# Altium PCB science-26.PcbDoc (part 1 of 2)
Units mm, origin at the board's own origin, x right, y up, seen from the top; angles counter-clockwise.
Board outline 76.84 x 97.03 mm, 4 copper layers (Top Layer, Layer 1, Layer 2, Bottom Layer), stack 1.586 mm thick; 101 components, 54 nets, 345 pads, 274 vias.
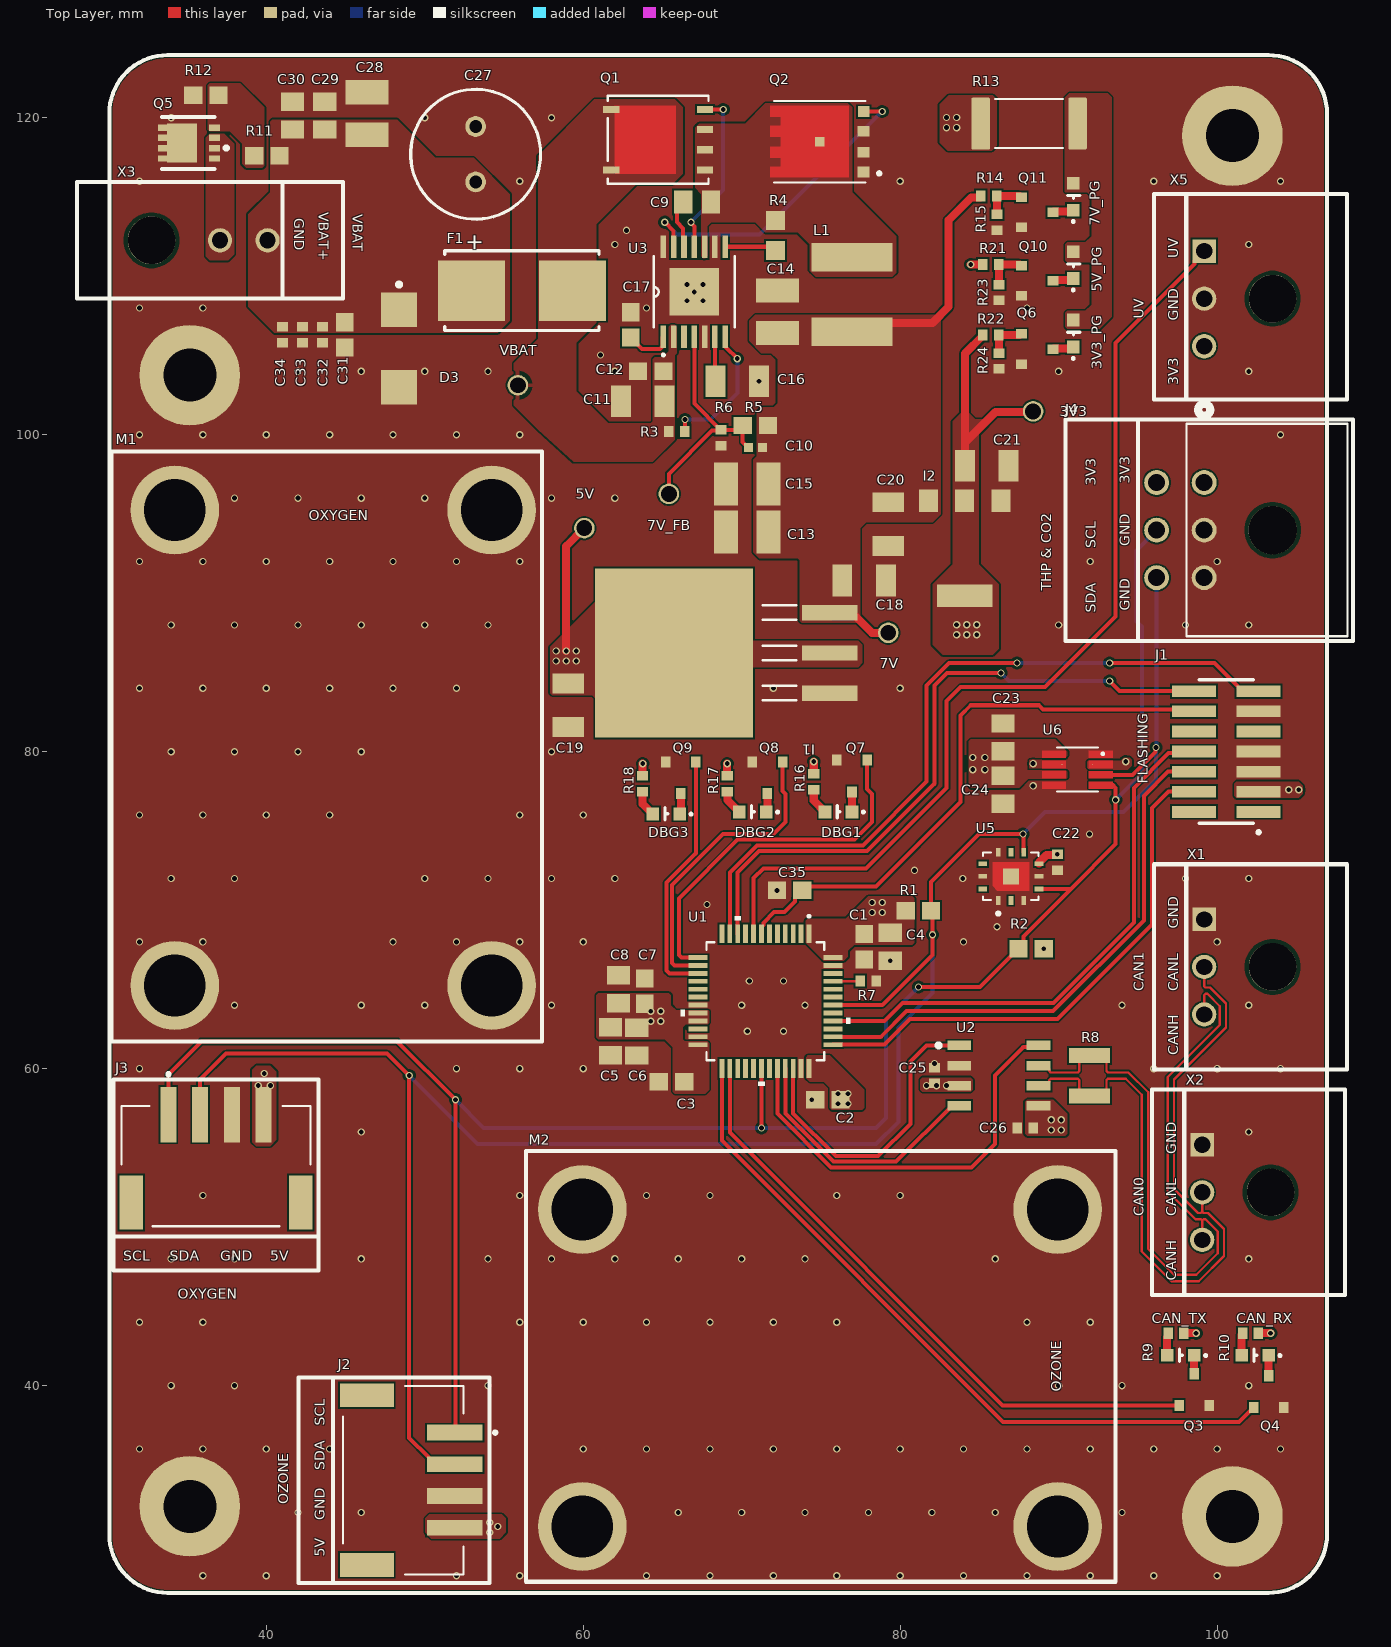
[diagram p0: Top Layer view]
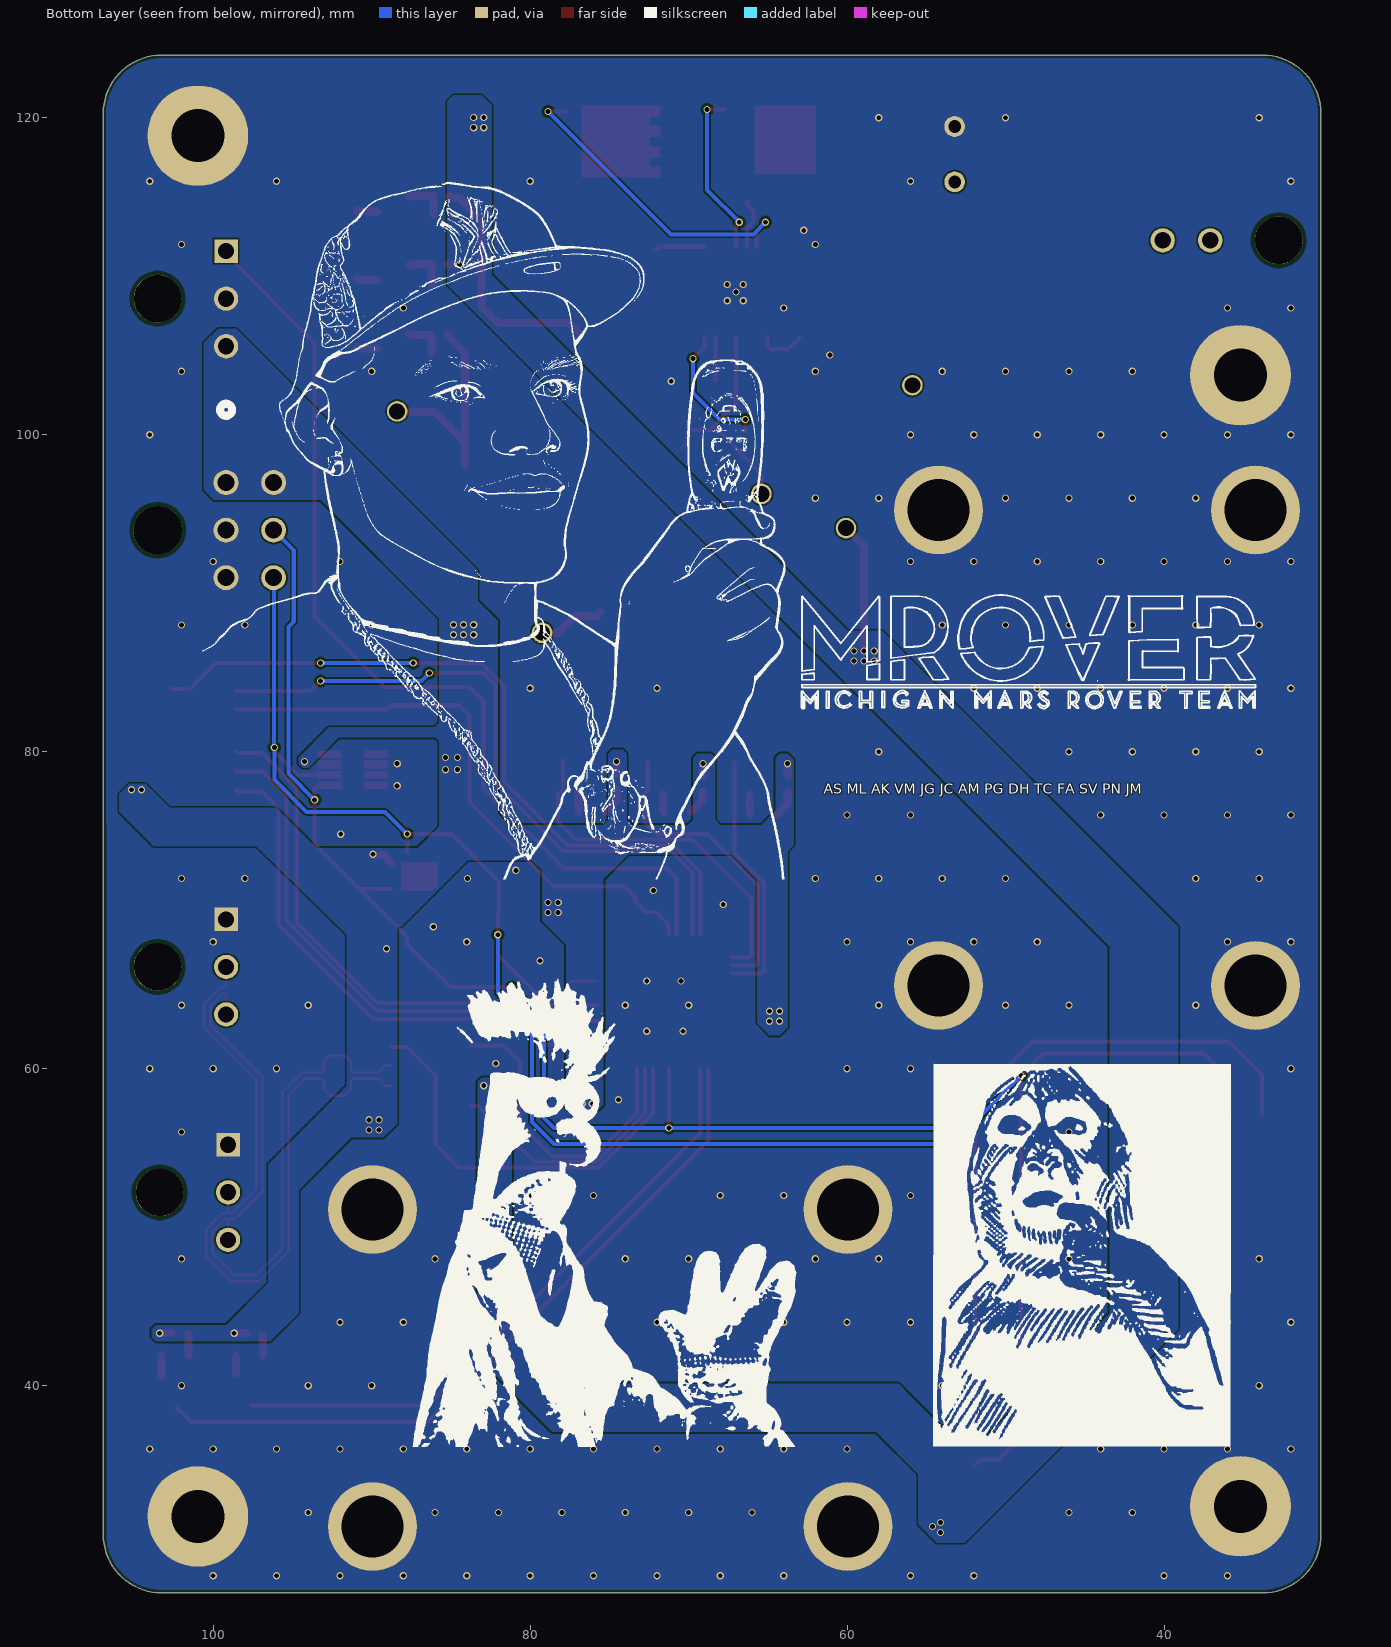
[diagram p1: Bottom Layer view, seen from below]
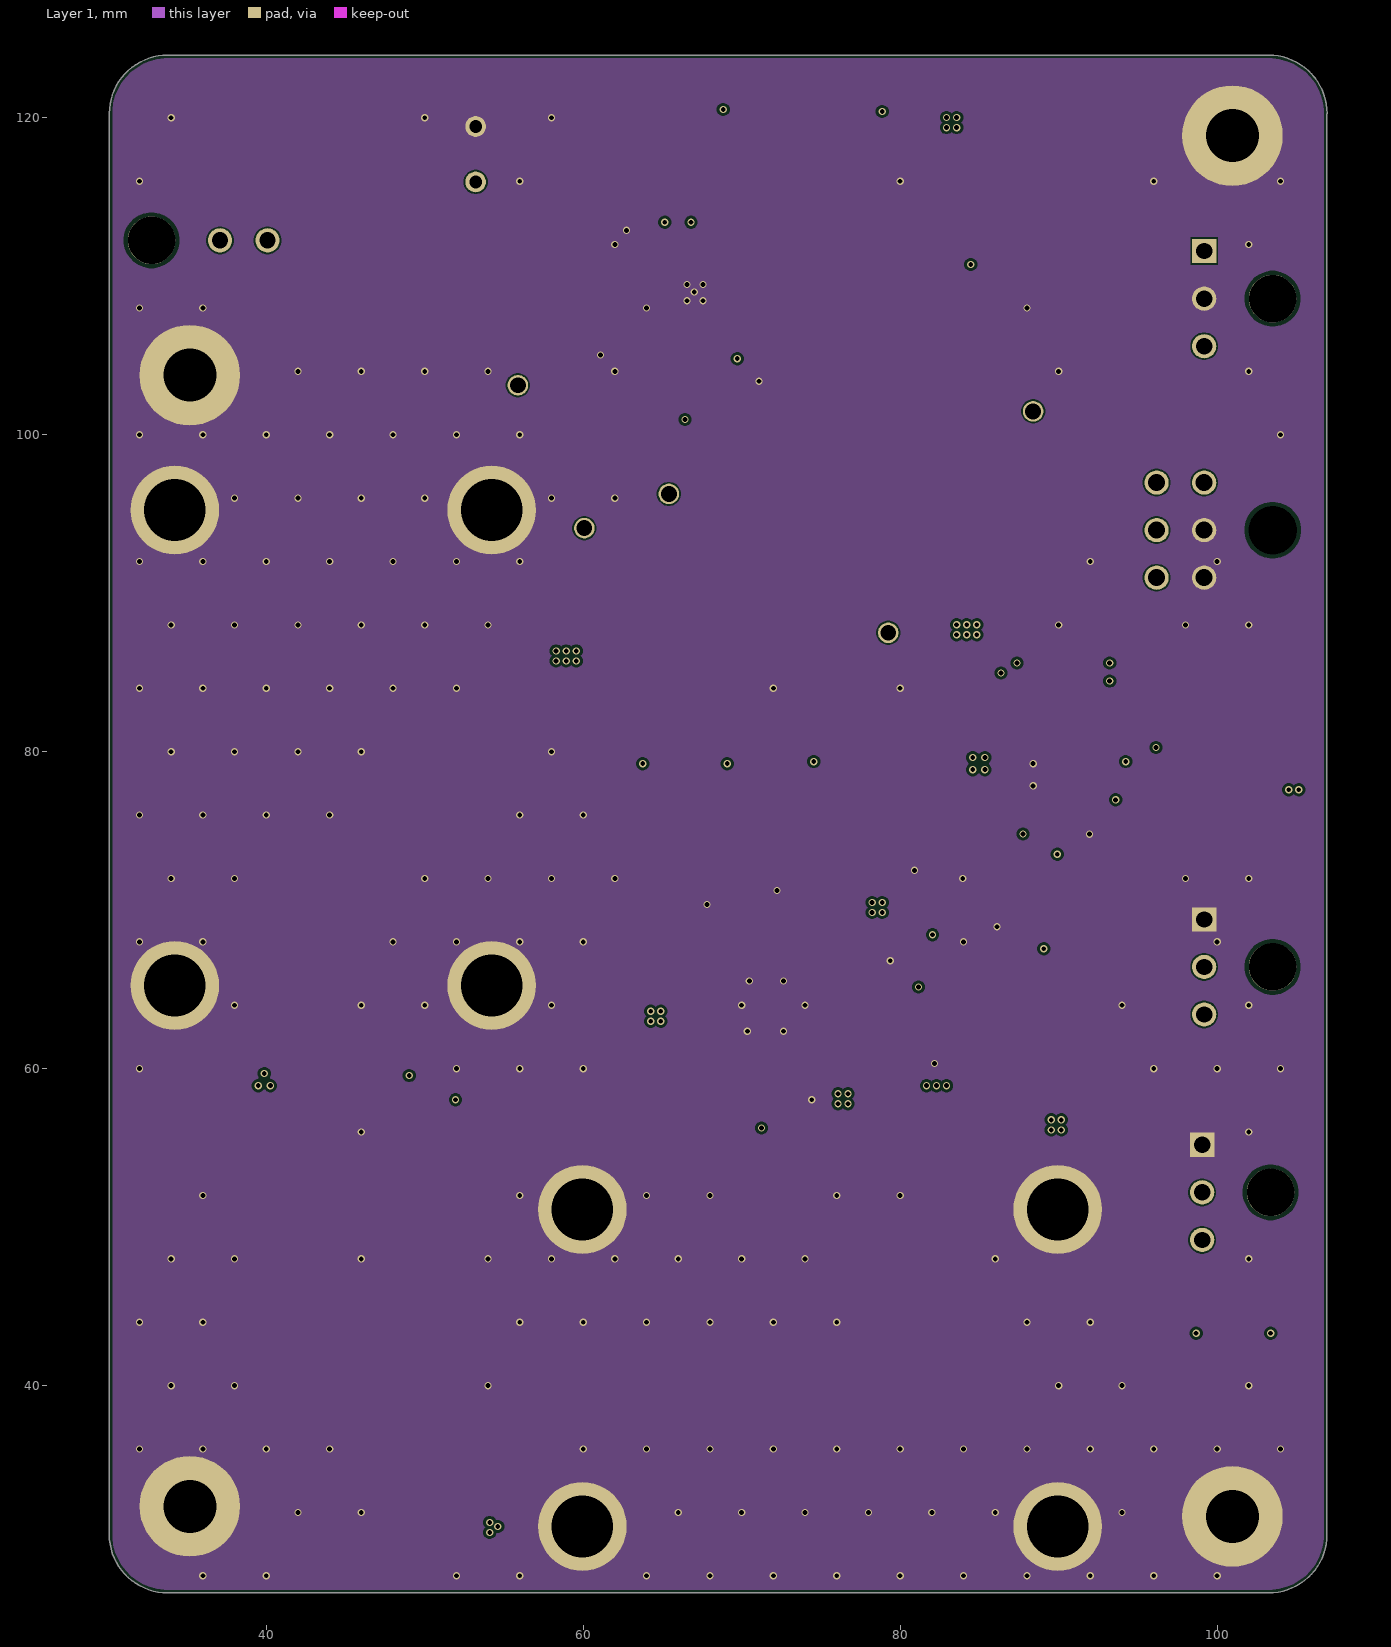
[diagram p2: Layer 1]
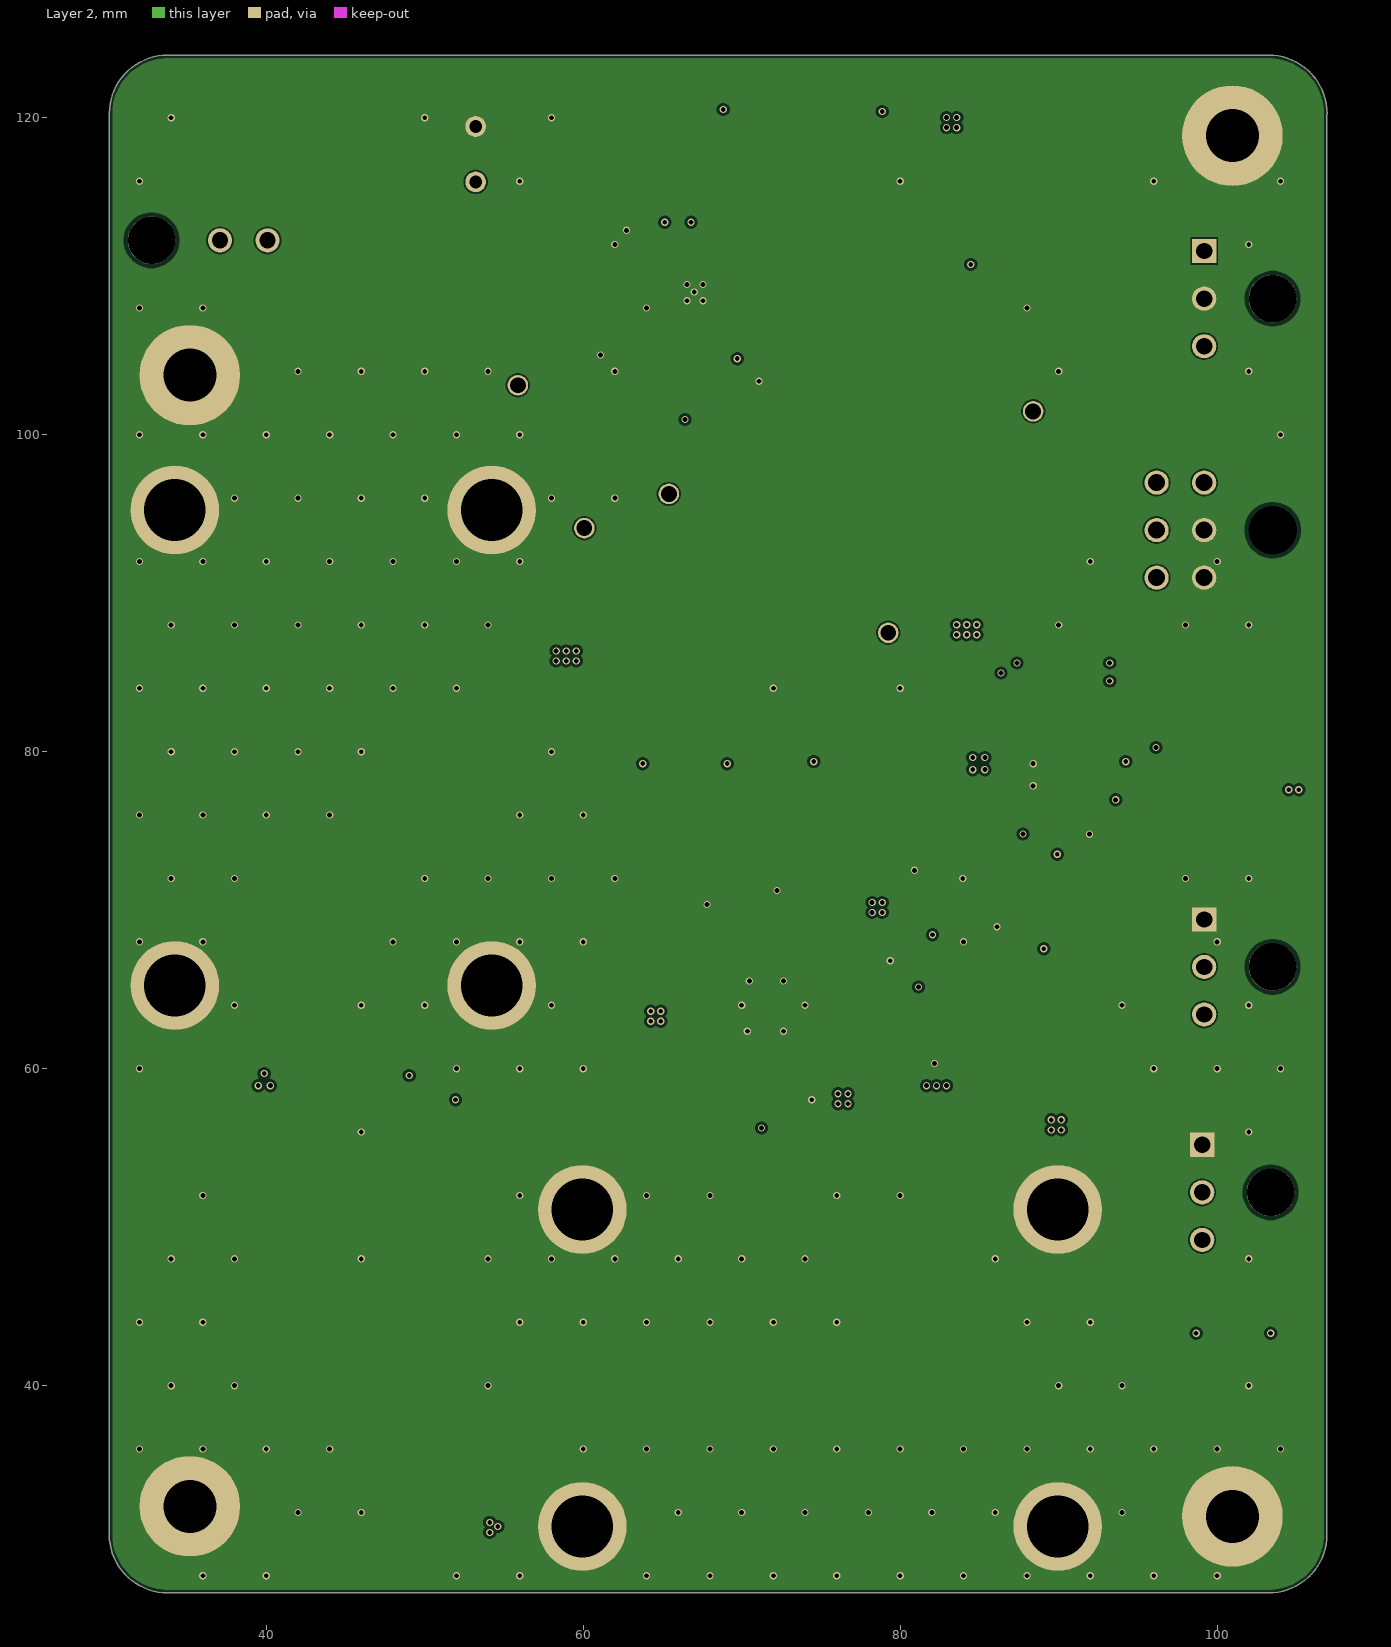
[diagram p3: Layer 2]

## Layer stack, top to bottom
Top Solder: solder mask 0.0102, Solder Resist, Dk 3.5
Top Layer: signal copper 0.035
Dielectric 2: prepreg 0.2103, PP-006, Dk 4.1
Layer 1: signal copper 0.0152
Dielectric 1: dielectric 1.065, FR-4, Dk 4.8
Layer 2: signal copper 0.0152
Dielectric 3: prepreg 0.2103, PP-006, Dk 4.1
Bottom Layer: signal copper 0.035
Bottom Solder: solder mask 0.0102, Solder Resist, Dk 3.5

## Board outline
30.097,30.609 ccw(c33.782,30.609) 33.782,26.924 103.247,26.924 103.249,26.922 ccw(c103.249,30.607) 106.934,30.607 106.934,120.265 106.936,120.267 ccw(c103.251,120.267) 103.251,123.952 33.786,123.952 33.784,123.954 ccw(c33.784,120.269) 30.099,120.269

## Design rules (kind name [scope] priority, off if disabled: settings)
BoardOutlineClearance [All] p1: gap=0.2 ignorepadtopadclearanceinfootprint=FALSE
Clearance "Stitching GND" [IsStitchingVia and InNet('GND') vs (IsVia and (Not IsStitchingVia)) Or IsPad] p1: gap=0.127 ignorepadtopadclearanceinfootprint=FALSE
Clearance [All] p2: gap=0.102 ignorepadtopadclearanceinfootprint=FALSE except(0.127: Arc-Via Track-Via SMDPad-Via THPad-Via Via-Via Via-Fill Via-Poly Via-Region Via-Text; 0.25: Arc-Hole Track-Hole SMDPad-Hole THPad-Hole Via-Hole Fill-Hole Poly-Hole Region-Hole Text-Hole)
ComponentClearance [All] p1: gap=0.102 collisioncheckmode=3 verticalgap=0.102 showdistances=TRUE
DiffPairsRouting CAN [OnLayer('Top Layer') And InDifferentialPairClass('CAN')] p1: maxlimit=0.254 minlimit=0.127 mostfreqgap=0.254 toplayer_mingap=0.254 toplayer_minwidth=0.144 toplayer_maxwidth=0.144 toplayer_prefwidth=0.144 midlayer1_maxgap=0.127 midlayer1_prefgap=0.127 midlayer1_minwidth=0.089 midlayer1_maxwidth=0.089 midlayer1_prefwidth=0.089 midlayer2_maxgap=0.127 midlayer2_prefgap=0.127 midlayer2_minwidth=0.089 midlayer2_maxwidth=0.089 midlayer2_prefwidth=0.089 bottomlayer_mingap=0.254 bottomlayer_minwidth=0.144 bottomlayer_maxwidth=0.144 bottomlayer_prefwidth=0.144 maxuncoupledlength=12.7
DiffPairsRouting [All] p2: maxlimit=0.102 minlimit=0.102 mostfreqgap=0.102 toplayer_minwidth=0.102 toplayer_maxwidth=1816.048 toplayer_prefwidth=0.102 midlayer1_minwidth=0.102 midlayer1_maxwidth=1816.048 midlayer1_prefwidth=0.102 midlayer2_minwidth=0.102 midlayer2_maxwidth=1816.048 midlayer2_prefwidth=0.102 bottomlayer_minwidth=0.102 bottomlayer_maxwidth=1816.048 bottomlayer_prefwidth=0.102 maxuncoupledlength=12.7
Height [All] p1: minheight=0 maxheight=1816.048 prefheight=12.7
HoleSize [All] p1: absolutevalues=TRUE maxlimit=6.3 minlimit=0.2 maxpercent=80.000 minpercent=20.000
HoleToHoleClearance [All] p1: gap=0.25 allowstackedmicrovias=FALSE
MinimumAnnularRing [All] p1: minimumring=0.076
MinimumSolderMaskSliver [All] p1: minsoldermaskwidth=0
PlaneClearance [All] p1: clearance=0.102
PlaneConnect PlaneConnectPowerPads [InPadClass('PowerPads')] p1: planeconnectstyle=Direct reliefexpansion=0.508 reliefentries=4 reliefconductorwidth=0.254 reliefairgap=0.254
PlaneConnect [All] p2: planeconnectstyle=Direct reliefexpansion=0.3 reliefentries=4 reliefconductorwidth=0.102 reliefairgap=0.102
PolygonConnect PolygonConnectPowerPads [All vs (InPadClass('PowerPads'))] p1: connectstyle=Direct reliefconductorwidth=0.254 reliefentries=4 polygonreliefangle="90 Angle" airgapwidth=0.254
PolygonConnect [All] p2: connectstyle=Direct reliefconductorwidth=0.102 reliefentries=4 polygonreliefangle="90 Angle" airgapwidth=0.102
RoutingVias [All] p1: holewidth=0.305 width=0.605 viastyle="Through Hole" minholewidth=0.3 minwidth=0.6 maxholewidth=0.405 maxwidth=0.705
SilkToSilkClearance [All] p1: silktosilkclearance=0
SilkToSolderMaskClearance [IsPad] p1: minsilkscreentomaskgap=0.102 clearancetoexposedcopper=TRUE
SolderMaskExpansion [All] p1: expansion=0.075 istentingtop=FALSE
SupplyNets "Schematic Supply Nets_5" [InNet('7V')] p1: voltage=0.000
SupplyNets "Schematic Supply Nets_4" [InNet('VBAT_UNFUSED')] p2: voltage=0.000
SupplyNets "Schematic Supply Nets_2" [InNet('VBAT')] p3: voltage=0.000
SupplyNets "Schematic Supply Nets_3" [InNet('GND')] p4: voltage=0.000
SupplyNets "Schematic Supply Nets_1" [InNet('5V')] p5: voltage=0.000
SupplyNets "Schematic Supply Nets" [InNet('3V3')] p6: voltage=0.000
Width [All] p1: maxlimit=0.508 minlimit=0.127 preferedwidth=0.254 minimp=50.000000 maximp=50.000000 favimp=50.000000
20 further rules are at their usual default settings.

## Classes and differential pairs
differential pair class CAN: CAN
component class U_Headers: J2 J3 J4 M1 M2
net class CAN: CAN_N CAN_P
component class U_UV_Sensor: X5
component class U_THP_Sensor: C23 C24 U6
component class U_MCU: C1 C2 C3 C4 C5 C6 C7 C8 C35 DBG1 DBG2 DBG3 J1 Q7 Q8 Q9 R1 R2 R7 R16 R17 R18 U1
component class U_Input_Power: C27 C28 C29 C30 C31 C32 C33 C34 D3 F1 Q5 R11 R12 X3
component class U_CO2_Sensor: C22
component class U_CAN: C25 C26 CAN_RX CAN_TX Q3 Q4 R8 R9 R10 U2 X1 X2
component class U_7V_Buck: 7V 7V_FB C9 C10 C11 C12 C13 C14 C15 C16 C17 L1 Q1 Q2 R3 R4 R5 R6 U3 VBAT
component class U_5V_3V3_LDO: 3V3 3V3_PG 5V 5V_PG 7V_PG C18 C19 C20 C21 I1 I2 Q6 Q10 Q11 R13 R14 R15 R21 R22 R23 R24
differential pair CAN: +CAN_P -CAN_N

## Components (designator, comment, footprint, x,y, rotation, side; value= is the part's Value field where it differs from the comment)
3V3 "5003" TEST-POINT-0001 88.392,101.473 r0 top
3V3_PG "BL-HKC36G-AV-TRB" LED-0603 91.683,104.948 r90 top
5V "5003" TEST-POINT-0001 60.071,94.107 r0 top
5V_PG "BL-HKC36G-AV-TRB" LED-0603 91.683,109.266 r90 top
7V "5003" TEST-POINT-0001 79.248,87.503 r180 top
7V_FB "5003" TEST-POINT-0001 65.405,96.266 r180 top
7V_PG "BL-HKC36G-AV-TRB" LED-0603 91.683,113.584 r90 top
C1 "CC0603KRX7R0BB104" CAP-0603 77.724,67.691 r90 top
C2 "CC0603KRX7R0BB104" CAP-0603 75.438,58.039 r0 top
C3 "CC0603KRX7R0BB104" CAP-0603 65.57,59.182 r0 top
C4 "CC0805KKX5R9BB475" CAP-0805 79.375,67.691 r90 top
C5 "GRM2195C1H103JA01D" CAP-0805 61.722,61.722 r90 top
C6 "CC0805KKX7R9BB105" CAP-0805 63.373,61.713 r90 top
C7 "CC0603KRX7R0BB104" CAP-0603 63.881,64.897 r270 top
C8 "CC0805KKX7R9BB105" CAP-0805 62.23,65.015 r270 top
C9 "KAM21KR72A474KL" CAP-0805 67.183,114.681 r180 top
C10 "CC0402JRNPO9BN500" CAP_CC0402_YAG 70.866,99.187 r0 top
C11 "CL31B106KBHNNNE" CAP-1206 63.754,102.108 r180 top
C12 "CC0603KRX7R0BB104" CAP-0603 64.262,104.013 r180 top
C13 "CL32B226KAJNNNE" CAP-1210 70.358,93.853 r0 top
C14 "CL32B226KAJNNNE" CAP-1210 72.263,107.767 r270 top
C15 "CL32B226KAJNNNE" CAP-1210 70.358,96.901 r0 top
C16 "GMC31CG153J200NT" CAP-1206 69.723,103.378 r0 top
C17 "UMK107BBJ225KA-T" CAP-0603 62.992,106.934 r90 top
C18 "293D106X9016A2TE3" CAP-1206 77.724,90.805 r180 top
C19 "293D106X9016A2TE3" CAP-1206 59.055,82.931 r90 top
C20 "293D106X9016A2TE3" CAP-1206 79.248,94.361 r90 top
C21 "293D106X9016A2TE3" CAP-1206 85.471,98.044 r180 top
C22 "CC0402KRX7R7BB104" CAP-0402 89.916,73.025 r270 top
C23 "CC0805KRX7R9BB104" CAP-0805 86.487,80.899 r90 top
C24 "CC0805KRX7R9BB104" CAP-0805 86.487,77.606 r270 top
C25 "CC0402KRX7R7BB104" CAP-0402 82.169,59.571 r90 top
C26 "CC0402KRX7R7BB104" CAP-0402 87.884,56.261 r180 top
C27 "860040674004" WCAP-ATUL_8X11.5(DXL) 53.213,117.701 r270 top
C28 "CL32B106KBJNNNE" CAP-1210 46.355,120.269 r270 top
C29 "CC0805KKX7R9BB105" CAP-0805 43.688,120.142 r270 top
C30 "CC0805KRX7R9BB104" CAP-0805 41.656,120.142 r270 top
C31 "CC0603KPX7R9BB103" CAP-0603 44.958,106.299 r90 top
C32 "CC0402KRX7R9BB102" CAP-0402 43.561,106.299 r90 top
C33 "CC0402JRNPO9BN101" CAP-0402 42.291,106.299 r90 top
C34 "CC0402JRNPO9BN100" CAP-0402 41.021,106.299 r90 top
C35 "CC0603KRX7R0BB104" CAP-0603 73.025,71.247 r180 top
CAN_RX "BL-HKC36G-AV-TRB" LED-0603 103.84,42.661 r180 top
CAN_TX "BL-HKC36G-AV-TRB" LED-0603 99.141,42.661 r180 top
D3 "SMBJ40CA" "DO-214AA (SMBJ)" 48.387,105.41 r90 top
DBG1 "BL-HKC36G-AV-TRB" LED-0603 77.551,76.951 r180 top
DBG2 "BL-HKC36G-AV-TRB" LED-0603 72.141,76.951 r180 top
DBG3 "BL-HKC36G-AV-TRB" LED-0603 66.68,76.824 r180 top
F1 "01550900M" FUSE-0001 56.134,109.093 r0 top
I1 "LM1085ISX-5.0NOPB" IC-TO-263-4 65.888,86.233 r90 top
I2 "LM1117IMPX-3.3/NOPB" IC-SOT-223-4 84.074,92.837 r270 top
J1 "FTSH-107-01-L-DV-K" SAMTEC_FTSH-107-01-L-DV-K 100.584,80.01 r90 top
J2 "S4B-PH-SM4-TB" JST_S4B-PH-SM4-TB 49.149,34.036 r270 top
J3 "S4B-PH-SM4-TB" JST_S4B-PH-SM4-TB 36.83,54.356 r0 top
J4 "430450600" CONN_SD-43045-001_06_MOL 99.185,96.98 r90 top
L1 "SRN6045TA-4R7M" PWRIND-4.7U-0001 76.962,108.839 r180 top
M1 "DK-Oxygen" DK-Oxygen 34.229,95.25 r270 top locked
M2 "DK-Ozone" DK-Ozone 59.944,31.115 r0 top locked
Q1 "NTMFS5C670NLT1G" NTMFS5C670NLT1G_ONS 64.732,118.618 r180 top
Q2 "CSD19534Q5A" TRANS_CSD19534Q5A 74.93,118.491 r180 top
Q3 "T2N7002AK,LM" IC-SOT23-3 98.552,39.751 r0 top
Q4 "T2N7002AK,LM" IC-SOT23-3 103.251,39.624 r0 top
Q5 "CSD18543Q3AT" IC-8VSONCLIP 37.605,116.568 r90 top
Q6 "T2N7002AK,LM" IC-SOT23-3 88.646,105.41 r270 top
Q7 "T2N7002AK,LM" IC-SOT23-3 76.962,78.47 r180 top
Q8 "T2N7002AK,LM" IC-SOT23-3 71.628,78.359 r180 top
Q9 "T2N7002AK,LM" IC-SOT23-3 66.167,78.359 r180 top
Q10 "T2N7002AK,LM" IC-SOT23-3 88.646,109.728 r270 top
Q11 "T2N7002AK,LM" IC-SOT23-3 88.646,114.046 r270 top
R1 "RC0603FR-074K7L" RES-0603 81.153,69.977 r0 top
R2 "RC0603FR-074K7L" RES-0603 88.265,67.564 r180 top
R3 "AC0402FR-7W90K9L" RES-0402 65.913,100.203 r0 top
R4 "RT0805BRD072K21L" RES-0805 72.136,112.583 r90 top
R5 "RC0603FR-07100KL" RES-0603 70.866,100.584 r0 top
R6 "RC0402FR-0710KL" RES-0402 68.707,99.814 r90 top
R7 "RC0402FR-070RL" RES-0402 77.978,65.532 r180 top
R8 "RC1210FR-07120RL" RES-1210 91.948,59.563 r90 top
R9 "RC0402FR-07100RL" RES-0402 97.409,43.307 r0 top
R10 "RC0402FR-07100RL" RES-0402 102.108,43.307 r0 top
R11 "RC0603FR-07200KL" RES-0603 40.043,117.602 r180 top
R12 "RC0603FR-07100KL" RES-0603 36.195,121.412 r180 top
R13 "SR2512JK-7W100RL" RESC6331X65N 88.138,119.634 r0 top
R14 "AC0402FR-0722KL" RES-0402 85.59,115.062 r0 top
R15 "RC0402FR-0710KL" RES-0402 86.106,113.411 r270 top
R16 "RC0402FR-07100RL" RES-0402 74.549,78.105 r90 top
R17 "RC0402FR-07100RL" RES-0402 69.088,77.978 r90 top
R18 "RC0402FR-07100RL" RES-0402 63.754,77.978 r90 top
R21 "RC0402FR-0710KL" RES-0402 85.717,110.744 r0 top
R22 "RC0402FR-074K7P" RES-0402 85.717,106.299 r0 top
R23 "RC0402FR-0710KL" RES-0402 86.233,108.974 r90 top
R24 "RC0402FR-0710KL" RES-0402 86.233,104.656 r90 top
U1 "STM32G431CBT6" IC-LQFP48 71.501,64.262 r270 top
U2 "TCAN1044VDRQ1" IC-8SOIC 86.233,59.563 r270 top
U3 "LM3150MHE/NOPB" MXA14A 67.011,109.017 r90 top
U5 "STC31-C-R3" XDCR_STC31-C-R3 86.992,72.136 r90 top
U6 "BME280" PSON65P250X250X100-8N 91.186,78.867 r0 top
VBAT "5003" TEST-POINT-0001 55.88,103.124 r0 top
X1 "Molex 43650-0300" 43650-0300 103.505,66.421 r90 top
X2 "Molex 43650-0300" 43650-0300 103.378,52.197 r90 top
X3 "Molex - Micro-Fit 3.0 Series connector,  3.00mm (0.118\") pitch header, 2 positions." 43045-0200 32.764,112.268 r270 top
X5 "Molex 43650-0300" 43650-0300 103.505,108.585 r90 top

## Footprints (in the part's own frame and the unit in brackets; to place one, negate y for a bottom-side part, rotate by r counter-clockwise, add the part's x,y. Pads: shape width x height; smd on the part's side, far side on the other; paste and mask are expansions set on the pad)
43045-0200 [mm]
  round 3 hole 3 unplated: 1(0,0)
  round 1.53 / inner round 1.524 / far side round 1.53 hole 1.02: P$1(0,4.32) P$2(0,7.32)
  body extent -3.57,-4.57 3.57,7.67, height 9.83
43650-0300 [mm]
  round 3 hole 3 unplated: 1(0,0)
  rect 1.482x1.482 / inner rect 1.524x1.524 / far side rect 1.482x1.482 hole 1.02: P$1(3,4.32)
  round 1.53 / inner round 1.524 / far side round 1.53 hole 1.02: P$2(0,4.32) P$3(-3,4.32)
  body extent -6.32,-4.57 6.33,5.33, height 5.68
CAP-0402 [mm]
  rect 0.6x0.7 smd: 1(-0.5,0) 2(0.5,0)
  body extent -0.5,-0.22 0.5,0.23, height 0.5
CAP-0603 [mm]
  rect 1.15x1.1 smd: 1(-0.8,0) 2(0.8,0)
  body extent -0.8,-0.45 0.8,0.45, height 0.8
CAP-0805 [mm]
  rect 1.16x1.47 smd: 1(-0.88,0) 2(0.88,0)
  body extent -1,-0.63 1,0.63, height 0.94
CAP-1206 [mm]
  rect 1.25x2 smd: 1(-1.375,0) 2(1.375,0)
  body extent -1.6,-0.8 1.6,0.8, height 1.5
CAP-1210 [mm]
  rect 1.53x2.72 smd: 1(-1.341,0) 2(1.341,0)
  body extent -1.6,-1.25 1.6,1.25, height 2.7
CAP_CC0402_YAG [mil]
  rect 22x22 smd paste+0 mask+0: 1(-17.5,0) 2(17.5,0)
  body extent -21,-11 21,11, height 22
CONN_SD-43045-001_06_MOL [mil]
  round 62 / inner round 60 / far side round 62 hole 42 paste-99999 mask+0: 1(0,0) 2(-118.11,0) 3(-236.22,0) 4(0,118.11) 5(-118.11,118.11) 6(-236.22,118.11)
  round 120 / inner round 60 / far side round 120 hole 120 unplated paste-99999 mask+0: 7(-118.11,-170.08)
  silkscreen extent -382,-356 196,44, body extent -377,-350 141,132, height 367
DK-Oxygen [mm]
  round 5.6 hole 3.9: 0(0,20) 0(0,0) 0(30,20) 0(30,0)
  body extent -3.51,-3.85 33.49,23.15, height 30.93
DK-Ozone [mm]
  round 5.6 hole 3.9: 0(0,0) 0(0,20) 0(30,0) 0(30,20)
  body extent -3.51,-3.56 33.49,23.44, height 22.2
"DO-214AA (SMBJ)" [mm]
  rect 2.16x2.26 smd: 1(-2.416,0) 2(2.484,0)
  silkscreen extent 3.94,-0.13 4.19,0.12, body extent -2.72,-1.95 2.78,1.95, height 2.45
FUSE-0001 [mil]
  rect 167x150 smd paste+0 mask+0: 1(-125.5,0) 2(125.5,0)
  silkscreen extent -192,-99 192,99, body extent -213,-103 213,103, height 10
IC-8SOIC [mm]
  rect 0.6x1.5 smd: 1(-1.905,-2.5) 2(-0.635,-2.5) 3(0.635,-2.5) 4(1.905,-2.5) 5(1.905,2.5) 6(0.635,2.5) 7(-0.635,2.5) 8(-1.905,2.5)
  silkscreen extent -2.03,-3.93 -1.78,-3.68, body extent -2.45,-3 2.45,3, height 1.75
IC-8VSONCLIP [mm]
  rect 0.4x0.7 smd paste-100 mask+0.05: 1(2.812,0.877) 2(0.862,0.877) 2(1.512,0.877) 2(2.162,0.877) 3(0.862,4.077) 3(1.512,4.077) 3(2.162,4.077) 3(2.812,4.077)
  rect 2.45x1.9 smd paste-100 mask+0.05: 3(1.837,2.917)
  silkscreen extent 0.19,0.03 3.49,4.18, body extent 0.18,0.89 3.48,4.19, height 1.1
IC-LQFP48 [mm]
  rect 1.194x0.305 smd paste+0 mask+0: 1(-4.25,2.75) 2(-4.25,2.25) 3(-4.25,1.75) 4(-4.25,1.25) 5(-4.25,0.75) 6(-4.25,0.25) 7(-4.25,-0.25) 8(-4.25,-0.75) 9(-4.25,-1.25) 10(-4.25,-1.75) 11(-4.25,-2.25) 12(-4.25,-2.75) 25(4.25,-2.75) 26(4.25,-2.25) 27(4.25,-1.75) 28(4.25,-1.25) 29(4.25,-0.75) 30(4.25,-0.25) 31(4.25,0.25) 32(4.25,0.75) 33(4.25,1.25) 34(4.25,1.75) 35(4.25,2.25) 36(4.25,2.75)
  rect 0.305x1.194 smd paste+0 mask+0: 13(-2.75,-4.25) 14(-2.25,-4.25) 15(-1.75,-4.25) 16(-1.25,-4.25) 17(-0.75,-4.25) 18(-0.25,-4.25) 19(0.25,-4.25) 20(0.75,-4.25) 21(1.25,-4.25) 22(1.75,-4.25) 23(2.25,-4.25) 24(2.75,-4.25) 37(2.75,4.25) 38(2.25,4.25) 39(1.75,4.25) 40(1.25,4.25) 41(0.75,4.25) 42(0.25,4.25) 43(-0.25,4.25) 44(-0.75,4.25) 45(-1.25,4.25) 46(-1.75,4.25) 47(-2.25,4.25) 48(-2.75,4.25)
  silkscreen extent -5.43,-5.35 5.35,5.35, body extent -4.5,-4.5 4.5,4.5, height 1.6
IC-SOT23-3 [mm]
  rect 0.6x0.7 smd: 1(-0.95,-1) 2(0.95,-1) 3(0,1)
  body extent -1.46,-1.18 1.46,1.19, height 1.12
IC-SOT-223-4 [mm]
  rect 1.4x1.2 smd mask+0.07: 1(-3,2.3) 3(-3,-2.3) 4(-3,0)
  rect 1.4x3.5 smd: 2(3,0)
  body extent -3.5,-3.25 3.5,3.25, height 1.68
IC-TO-263-4 [mil]
  rect 38x138 smd: 1(-100,-381) 2(0,-381) 3(100,-381)
  rect 420x392 smd: 4(0,6)
  silkscreen extent -118,-298 118,-214, body extent -210,-365 210,118, height 67
JST_S4B-PH-SM4-TB [mm]
  rect 1x3.5 smd: 1(-3,2.75) 2(-1,2.75) 3(1,2.75) 4(3,2.75)
  rect 1.5x3.4 smd: SH1(-5.35,-2.8) SH2(5.35,-2.8)
  silkscreen extent -5.95,-4.3 5.95,5.4, body extent -5.95,-4.3 5.95,4.3, height 5.5
LED-0603 [mm]
  rect 0.8x0.8 smd: 1(2.291,0.751) 2(0.589,0.751)
  silkscreen extent -0.2,0.34 1.52,1.13, body extent 0.65,0.36 2.25,1.16, height 0.39
MXA14A [mil]
  rect 56x14 smd: 1(-112,76.77) 2(-112,51.18) 3(-112,25.59) 4(-112,0) 5(-112,-25.59) 6(-112,-51.18) 7(-112,-76.77) 8(112,-76.77) 9(112,-51.18) 10(112,-25.59) 11(112,0) 12(112,25.59) 13(112,51.18) 14(112,76.77)
  rect 118x122 smd paste-61 mask-61: 15(0,0)
  silkscreen extent -160,-100 88,100, body extent -126,-101 126,101, height 43
NTMFS5C670NLT1G_ONS [mil]
  rect 40x18 smd paste+0 mask+0: 1(-116.5,-75) 2(-116.5,75) 2(-116.5,-25) 2(-116.5,25) 3(116.5,75) 3(116.5,-75)
  Top Layer region: 108.5,-84.65 108.5,84.65 -43.5,84.65 -43.5,-84.65
  silkscreen extent -125,-110 125,110, body extent -124,-104 124,104, height 43
PSON65P250X250X100-8N [mm]
  round 0.025 smd: 1(0.97,0.975) 2(0.97,0.325) 3(0.97,-0.325) 4(0.97,-0.975) 5(-0.97,-0.975) 6(-0.97,-0.325) 7(-0.97,0.325) 8(-0.97,0.975)
  Top Layer region: 0.725,1.2 0.725,0.75 2.225,0.75 2.225,1.2
  Top Layer region: -2.225,0.55 -2.225,0.1 -0.725,0.1 -0.725,0.55
  Top Layer region: -2.225,-0.75 -2.225,-1.2 -0.725,-1.2 -0.725,-0.75
  Top Layer region: 0.725,0.55 0.725,0.1 2.225,0.1 2.225,0.55
  Top Layer region: -2.225,-0.1 -2.225,-0.55 -0.725,-0.55 -0.725,-0.1
  Top Layer region: -2.225,1.2 -2.225,0.75 -0.725,0.75 -0.725,1.2
  Top Layer region: 0.725,-0.1 0.725,-0.55 2.225,-0.55 2.225,-0.1
  Top Layer region: 0.725,-0.75 0.725,-1.2 2.225,-1.2 2.225,-0.75
  silkscreen extent -1.3,-1.39 1.65,1.39, body extent -1.3,-1.25 1.2,1.25, height 1
PWRIND-4.7U-0001 [mm]
  rect 5.1x1.8 smd: 1(0,-2.35) 2(0,2.35)
RES-0402 [mm]
  rect 0.6x0.7 smd: 1(-0.5,0) 2(0.5,0)
  body extent -0.5,-0.25 0.5,0.25, height 0.3
RES-0603 [mm]
  rect 1.15x1.1 smd: 1(-0.8,0) 2(0.8,0)
  body extent -0.8,-0.4 0.8,0.4, height 0.43
RES-0805 [mm]
  rect 1.2x1.2 smd: 1(-0.95,0) 2(0.95,0)
  body extent -1,-0.6 1,0.6, height 0.71
RES-1210 [mm] "Chip Resistor, 2-Leads, Body 3.10x2.60mm, IPC High Density"
  rect 0.95x2.6 smd: 1(-1.275,0) 2(1.275,0)
  body extent -1.6,-1.35 1.6,1.35, height 0.6
RESC6331X65N [mm]
  rrect15% 1.17x3.27 smd: 1(-3.055,0) 2(3.055,0)
  silkscreen extent -2.15,-1.55 2.15,1.55, body extent -3.17,-1.55 3.17,1.55, height 0.65
SAMTEC_FTSH-107-01-L-DV-K [mm]
  rect 0.74x2.79 smd: 01(-3.81,-2.035) 02(-3.81,2.035) 03(-2.54,-2.035) 04(-2.54,2.035) 05(-1.27,-2.035) 06(-1.27,2.035) 07(0,-2.035) 08(0,2.035) 09(1.27,-2.035) 10(1.27,2.035) 11(2.54,-2.035) 12(2.54,2.035) 13(3.81,-2.035) 14(3.81,2.035)
  silkscreen extent -5.19,-2.13 4.53,1.72, body extent -4.44,-2.82 4.44,3.02, height 5.96
TEST-POINT-0001 [mm] "2024 miniature test point"
  round 1.3 hole 1: 1(0,0)
  body extent -1.27,-1.27 1.27,1.27, height 4.57
TRANS_CSD19534Q5A [mm]
  rect 0.75x0.675 smd paste-1: 1(-2.775,-1.9) 2(-2.752,1.917) 2(-2.752,-0.66) 2(-2.752,0.66)
  rect 0.6x0.6 smd paste-1 mask+0: 3(0,0)
  Top Layer region: 3.127,1.58 2.472,1.58 2.472,0.998 3.127,0.998 3.127,0.323 2.472,0.323 2.472,-0.323 3.127,-0.323 3.127,-0.998 2.472,-0.998 2.472,-1.58 3.127,-1.58 3.127,-2.255 -1.823,-2.255 -1.823,2.255 3.127,2.255
  silkscreen extent -3.85,-2.58 2.88,2.58, body extent -3.04,-2.54 2.96,2.56, height 1.05
WCAP-ATUL_8X11.5(DXL) [mm]
  round 1.308 hole 0.8: 1(1.75,0) 2(-1.75,0)
  silkscreen extent -4.1,-4.1 4.1,4.1, body extent -4.04,-4 3.94,3.99, height 11.39
XDCR_STC31-C-R3 [mm]
  rect 0.55x0.3 smd: 1(-1.525,0.8) 2(-1.525,0) 3(-1.525,-0.8) 7(1.525,-0.8) 8(1.525,0) 9(1.525,0.8)
  rect 0.3x0.55 smd: 4(-0.8,-1.775) 5(0,-1.775) 6(0.8,-1.775) 10(0.8,1.775) 11(0,1.775) 12(-0.8,1.775)
  rect 1x1 smd paste-1 mask+0: 13(0,0)
  Top Layer region: 0.9,-1.15 -0.9,-1.15 -0.9,0.85 -0.6,1.15 0.9,1.15
  silkscreen extent -2.45,-1.75 1.5,1.75, body extent -1.5,-1.75 1.5,1.75, height 1.1

## Part data
3V3 5V 7V 7V_FB VBAT: library part TEST-POINT-0001, "Oranange PC Test Point, Miniature Phoisphor Bronze Silver Plating Through Hole Mounting Type"
3V3_PG 5V_PG 7V_PG CAN_RX CAN_TX DBG1 DBG2 DBG3: library part LED-0001, "LED YELLOW CLEAR 0603 SMD", Forward Current=30mA, Forward Voltage=2V, ComponentLink1Description=Datasheet, ComponentLink1URL=https://www.americanbrightled.com/pdffiles/led-components/smt/BL-HKC36G-AV-TRB.pdf
C1 C2 C3 C7 C35: library part CAP-100N-0001, "CAP CER 0.1UF 100V X7R 0603", Capacitance="100 nF", Voltage="100 V", ComponentLink1Description=Datasheet, ComponentLink1URL=https://www.yageo.com/upload/media/product/app/datasheet/mlcc/upy-np0x7r_mv_100-to-630v.pdf, Device Class=Ceramic, Size=0603
C4: library part CAP-4.7U-0002, "CAP CER 4.7UF 50V X5R 0805", Capacitance="4.7 uF", Voltage="50 V", ComponentLink2Description=Datasheet, ComponentLink2URL=http://www.yageo.com/documents/recent/UPY-GPHC_Y5V_6.3V-to-50V_8.pdf, Device Class=Ceramic, Size=0805
C5: library part CAP-10N-0001, "CAP CER 10000PF 50V C0G/NP0 0805", Capacitance=10nF, Voltage=50V, ComponentLink1Description=Datasheet, ComponentLink1URL=https://search.murata.co.jp/Ceramy/image/img/A01X/G101/ENG/GRM2195C1H103JA01-01.pdf, Device Class=Ceramic, Size=0805
C6 C8 C29: library part CAP-1U-0001, "CAP CER 1UF 50V X7R 0805", Capacitance="1.0 uF", Voltage="50 V", ComponentLink2Description=Datasheet, ComponentLink2URL=https://www.yageo.com/upload/media/product/productsearch/datasheet/mlcc/UPY-GPHC_X7R_6.3V-to-250V_24.pdf, Device Class=Ceramic, Size=0805
C9: library part CAP-0.47U-0001, "0.47 µF ±10% 100V Ceramic Capacitor X7R 0805 (2012 Metric)", Capacitance="0.47 uF", Package Size=0805, Temperature Coefficient=X7R, Tolerance="+/- 10%", Voltage=100V, Assembled?=No
C10: library part CAP-50p, "50 pF ±5% 50V Ceramic Capacitor C0G, NP0 0402 (1005 Metric)", Capacitance=50pF, Manufacturer_Name=Yageo, Voltage=50V, ComponentLink1Description=Datasheet, ComponentLink1URL=https://www.yageo.com/en/Chart/Download/pdf/CC0402JRNPO9BN500, Copyright="Copyright (C) 2025 Ultra Librarian. All rights reserved.", Manufacturer_Part_Number=CC0402JRNPO9BN500
C11: library part CAP-10U-0001, "10 µF ±10% 50V Ceramic Capacitor X7R 1206 (3216 Metric)", Capacitance="10uF +/-20%", Manufacturer="Samsung Electro-Mechanics", Package Size=1206, Temperature Coefficient=X7R, Voltage Rating=50V, Assembled?=no, Manufacturer Part Number=CL31B106KBHNNNE
C12: library part CAP-100N-0001, "CAP CER 0.1UF 100V X7R 0603", Capacitance="100nF +/-10%", Manufacturer=YAGEO, Package Size=0603, Temperature Coefficient=X7R, Voltage Rating=100V, Assembled?=no, Manufacturer Part Number=CC0603KRX7R0BB104
C13 C14 C15: library part CAP-22U-0003, "22 µF ±10% 25V Ceramic Capacitor X7R 1210 (3225 Metric)", Capacitance="22 uF", Package Size=1210, Temperature Coefficient=X7R, Tolerance="+/- 10%", Voltage=25V, Assembled?=No
C16: library part CAP-15N-0001, "0.015 µF ±5% 200V Ceramic Capacitor C0G, NP0 1206 (3216 Metric)", Parameter 1="15 nF +/- 5%", Parameter 2=200V
C17: library part CAP-2.2U-0001, "2.2 µF ±10% 50V Ceramic Capacitor X5R 0603 (1608 Metric)", Capacitance="2.2 uF", oltage=50V
C18 C19 C20 C21: library part CAP-10U-0004, "CAP TANT 10UF 10% 16V 1206", Capacitance="10 uF", Voltage=16V, ComponentLink1Description=Datasheet, ComponentLink1URL=https://www.lcsc.com/datasheet/lcsc_datasheet_2304140030_Vishay-Intertech-293D106X9016A2TE3_C110038.pdf, Device Class=Tantalum, Size=1206
C22 C25 C26: library part CAP-0.1U-0001, "CAP CER 0.1UF 16V X7R 0402", Capacitance="100 nF", Voltage Rating="16 V", ComponentLink2Description=Datasheet, ComponentLink2URL=https://www.yageo.com/upload/media/product/productsearch/datasheet/mlcc/UPY-GPHC_X7R_6.3V-to-250V_24.pdf, Device Class=Ceramic, Size=0402
C23 C24 C30: library part CAP-0.1U-0002, "CAP CER 0.1UF 50V X7R 0805", Capacitance="100 nF", Voltage Rating="50 V", ComponentLink2Description=Datasheet, ComponentLink2URL=https://www.yageo.com/upload/media/product/productsearch/datasheet/mlcc/UPY-GPHC_X7R_6.3V-to-250V_24.pdf, Device Class=Ceramic, Size=0805
C27: library part CAP-100U-0002_1, "100 µF 50 V Aluminum Electrolytic Capacitors Radial, Can 7000 Hrs @ 105°C", Capacitance=100uF, Package=None, Voltage=50V, Availability=Unavailable, ComponentLink1Description=Datasheet, ComponentLink1URL=https://www.we-online.com/components/products/datasheet/860040674004.pdf, MF="{'manufacturer': u'W\xfcrth Elektronik'}", MP=860040674004, Price=None
C28: library part CAP-10U-0002, "CAP CER 10UF 50V X7R 1210", Capacitance="10 uF", Voltage=50V, ComponentLink1Description=Datasheet, ComponentLink1URL=https://mm.digikey.com/Volume0/opasdata/d220001/medias/docus/41/CL32B106KBJNNNE_Spec.pdf, Device Class=Ceramic, Size=1210
C31: library part CAP-10N-0002, "CAP CER 10000PF 50V X7R 0603", Capacitance="10 nF", Voltage="50 V", ComponentLink2Description=Datasheet, ComponentLink2URL=http://www.yageo.com/documents/recent/UPY-GPHC_X7R_6.3V-to-50V_18.pdf, Device Class=Ceramic, Size=0603
C32: library part CAP-1N-0001, "CAP CER 1000PF 50V X7R 0402", Capacitance="1.0 nF", Voltage="50 V", ComponentLink2Description=Datasheet, ComponentLink2URL=http://www.yageo.com/documents/recent/UPY-GP_NP0_16V-to-50V_16.pdf, Device Class=Ceramic, Size=0402
C33: library part CAP-100P-0001, "CAP CER 100PF 50V C0G/NPO 0402", Capacitance="100 pF", Voltage=50V, ComponentLink1Description=Datasheet, ComponentLink1URL=https://www.yageo.com/upload/media/product/productsearch/datasheet/mlcc/UPY-GP_NP0_16V-to-50V_18.pdf, Device Class=Ceramic, Size=0402
C34: library part CAP-10P-0001, "CAP CER 10PF 50V C0G/NPO 0402", Capacitance="10 pF", Voltage=50V, ComponentLink1Description=Datasheet, ComponentLink1URL=https://www.yageo.com/upload/media/product/productsearch/datasheet/mlcc/UPY-GP_NP0_16V-to-50V_18.pdf, Device Class=Ceramic, Size=0402
D3: library part DIO-TVS-0001, "TVS DIODE 40VWM 64.5VC DO214AA", Current Rating=9.3A, Voltage Rating=64.5V, ComponentLink1Description=Datasheet, ComponentLink1URL=https://www.littelfuse.com/media?resourcetype=datasheets&itemid=09a6ae9a-73cb-4ac4-acac-e6dab92ab953&filename=littelfuse_tvs_diode_smbj_datasheet.pdf
F1: library part FUSE-0001, "FUSE BLOK CARTRIDGE 125V 10A SMD", Fuse Current=5A, Voltage Rating=125V, ComponentLink2Description=Datasheet, ComponentLink2URL=https://www.littelfuse.com/~/media/electronics/datasheets/fuses/littelfuse_fuse_154_154t_154l_154tl_datasheet.pdf.pdf
I1: library part IC_LDO_5V_0002, "IC REG LIN 5V 3A DDPAK/TO263-3", Mfr_Name="Texas Instruments", ComponentLink1Description=Datasheet, ComponentLink1URL=https://www.ti.com/lit/ds/symlink/lm1085.pdf?HQS=dis-dk-null-digikeymode-dsf-pf-null-wwe&ts=1729859809163&ref_url=https%253A%252F%252Fwww.ti.com%252Fgeneral%252Fdocs%252Fsuppproductinfo.tsp%253FdistId%253D10%2526gotoUrl%253Dhttps%253A%252F%252Fwww.ti.com%252Flit%252Fgpn%252Flm1085, RefDes=RefDes, Type=Type
I2: library part IC_LDO_3V3_0001, "IC REG LIN 3.3V 800MA SOT223-4", ComponentLink1Description="New link", ComponentLink1URL=https://www.ti.com/lit/ds/symlink/lm1117.pdf?HQS=dis-dk-null-digikeymode-dsf-pf-null-wwe&ts=1721700739746
J1: library part CONN_Flashing-0001, "Connector Header Surface Mount 14 position 0.050\" (1.27mm)", Package=None, Availability=Unavailable, ComponentLink1Description=Datasheet, ComponentLink1URL=https://mm.digikey.com/Volume0/opasdata/d220001/medias/docus/6209/ftsh-1xx-xx-xxx-dv-xxx-xxx-x-xx-mkt.pdf, MF=Samtec, MP=FTSH-107-01-L-DV-K, Price=None
J2 J3: library part CONN-4POS-JST-0001, "Connector Header Surface Mount, Right Angle 4 position 0.079 (2.00mm)", Package=None, Check_prices=https://www.snapeda.com/parts/S4B-PH-SM4-TB/JST/view-part/?ref=eda, ComponentLink1Description=Datasheet, ComponentLink1URL=https://www.jst-mfg.com/product/pdf/eng/ePH.pdf, MF="JST Sales", MP=S4B-PH-SM4-TB, SnapEDA_Link=https://www.snapeda.com/parts/S4B-PH-SM4-TB/JST/view-part/?ref=snap
J4: library part CONN_6POS_430450600, "Micro-Fit 3.0 Right-Angle Header, 3.00mm Pitch, Dual Row, 6 Circuits, with Snap-in Plastic Peg PCB Lock, Tin, Glow-Wire Capable, Black", Manufacturer_Name="Molex Connector Corporation", Copyright="Copyright (C) 2025 Ultra Librarian. All rights reserved.", Manufacturer_Part_Number=430450600, RefDes=RefDes, Type=Type
L1: library part PWRIND-4.7U-0001, "4.7 µH Semi-Shielded Drum Core, Wirewound Inductor 4.5 A 26mOhm Nonstandard", Current Rating=4.5A, Inductance="4.7 uH +/-20%", Saturation Current=6.8A, DCR="26 mOhm"
Q1: library part NMOS-71A-0001, "N-Channel 60 V 17A (Ta), 71A (Tc) 3.6W (Ta), 61W (Tc) Surface Mount 5-DFN (5x6) (8-SOFL)", Manufacturer_Name=onsemi, Max Current="71 A", Max Voltage="60 V", Copyright="Copyright (C) 2025 Ultra Librarian. All rights reserved.", Manufacturer_Part_Number=NTMFS5C670NLT1G, RefDes=RefDes, Type=Type
Q2: library part NMOS-44A-0001, "N-Channel 100 V 44A (Tc) 3.2W (Ta), 63W (Tc) Surface Mount 8-VSONP (5x6)", Current Max=44A, Package="VSONP-8 Texas Instruments", Voltage Max="100 V", Availability=Good, DigiKey-Purchase-URL=https://snapeda.com/shop?store=DigiKey&id=485742, MF="Texas Instruments", Mouser-Purchase-URL=https://snapeda.com/shop?store=Mouser&id=485742, MP=CSD19534Q5A, Price=None, SnapEDA_Link=https://www.snapeda.com/parts/CSD19534Q5A/Texas%20Instruments/view-part/485742/?ref=snap, Texas_Instruments-Purchase-URL=https://snapeda.com/shop?store=Texas+Instruments&id=485742
Q3 Q4 Q6 Q7 Q8 Q9 Q10 Q11: library part NMOS-200MA-0001, "MOSFET N-CH 60V 200MA SOT23", Continuous Current=200mA, Voltage=60V, ComponentLink1Description=Datasheet, ComponentLink1URL=https://toshiba.semicon-storage.com/info/T2N7002AK_datasheet_en_20150401.pdf?did=29712&prodName=T2N7002AK
Q5: library part NMOS-60A-0001, "MOSFET N-CH 60V 12A/60A 8VSON", Continuous Current=60A, Voltage=60V, ComponentLink2Description=Datasheet, ComponentLink2URL=http://www.ti.com/lit/ds/symlink/csd18543q3a.pdf
R1 R2: library part RES-4.7k-0001, "RES 4.7K OHM 1% 1/10W 0603", Power=1/10W, Resistance=4.7k, Tolerance=1%, ComponentLink1Description=Datasheet, ComponentLink1URL=https://www.yageo.com/upload/media/product/products/datasheet/rchip/PYu-RC_Group_51_RoHS_L_12.pdf, Size=0603
R3: library part RES-90.9K-0001, "90.9 kOhms ±1% 0.125W, 1/8W Chip Resistor 0402 (1005 Metric) Automotive AEC-Q200, Moisture Resistant Thick Film", Parameter 1="90.9K +/-1%", Parameter 2="1/8 W"
R4: library part RES-2.21K-0001, "2.21 kOhms ±0.1% 0.125W, 1/8W Chip Resistor 0805 (2012 Metric) Thin Film", Power="1/8 W", Resistance="2.21 kOhms +/-5%"
R5: library part RES-100K-0003, "100 kOhms ±1% 0.1W, 1/10W Chip Resistor 0603 (1608 Metric) Moisture Resistant Thick Film", Package Size=0603, Power="1/10 W", Resistance="100 kOhm", Tolerance="+/- 1%", Assembled?=No
R6: library part RES-10K-0001, "RES 10K OHM 1% 1/16W 0402", Manufacturer=YAGEO, Package Size=0402, Power Rating=1/16W, Resistance="10kOhm +/-1%", Assembled?=no, Manufacturer Part Number=RC0402FR-0710KL
R7: library part RES-0-0002-JLC, "62.5mW Thick Film Resistors 50V -55℃~+155℃ 0Ω 0402 Chip Resistor - Surface Mount ROHS", JLC part number=C106231, Power="62.5 mW", Resistance="0 Ohm", Assembled?=yes
R8: library part RES-120-0001, "RES 120 OHM 1% 1/2W 1210", Power=1/2W, Resistance=120R, Tolerance=1%, ComponentLink1Description=Datasheet, ComponentLink1URL=https://www.yageo.com/upload/media/product/products/datasheet/rchip/PYu-RC_Group_51_RoHS_L_12.pdf, Size=1210
R9 R10 R16 R17 R18: library part RES-100-0001, "RES 100 OHM 1% 1/16W 0402", Power=1/16W, Resistance=100R, Tolerance=1%, ComponentLink1Description=Datasheet, ComponentLink1URL=https://www.yageo.com/upload/media/product/products/datasheet/rchip/PYu-RC_Group_51_RoHS_L_12.pdf, Size=0402
R11: library part RES-200k-0001, "RES SMD 200K OHM 1% 1/10W 0603", Power=100mW, Resistance=200k, Tolerance=1%, ComponentLink1Description=Datasheet, ComponentLink1URL=https://www.yageo.com/upload/media/product/products/datasheet/rchip/PYu-RC_Group_51_RoHS_L_12.pdf, Size=0603
R12: library part RES-100k-0001, "RES SMD 100K OHM 1% 1/10W 0603", Power=100mW, Resistance=100k, Tolerance=1%, ComponentLink1Description=Datasheet, ComponentLink1URL=https://www.yageo.com/upload/media/product/products/datasheet/rchip/PYu-RC_Group_51_RoHS_L_12.pdf, Size=0603
R13: library part RES-100-0002, "100 Ohms ±5% 2W Chip Resistor 2512 (6332 Metric) Automotive AEC-Q200, Pulse Withstanding Thick Film", Package=None, Power=2W, Resistance=100, Availability=Unavailable, ComponentLink1Description=Datasheet, ComponentLink1URL=https://www.yageogroup.com/content/Resource%20Library/Datasheet/PYU-SR_20105_ROHS_L.pdf, MF="{'manufacturer': u'YAGEO'}", MP=SR2512JK-7W100RL, Price=None
R14: library part RES-22K-0002-JLC, "62.5mW Thick Film Resistors 50V ±100ppm/℃ ±1% -55℃~+155℃ 22kΩ 0402  Chip Resistor - Surface Mount ROHS", JLC part number=C144778, Power="1/16 W", Resistance="22K Ohm +/- 1%", Assembled?=yes
R15 R21 R23 R24: library part RES-10k-0001, "RES 10K OHM 1% 1/16W 0402", Power=1/16W, Resistance=10k, Tolerance=1%, ComponentLink1Description=Datasheet, ComponentLink1URL=https://www.yageo.com/upload/media/product/products/datasheet/rchip/PYu-RC_Group_51_RoHS_L_12.pdf, Size=0402
R22: library part RES-4.7K-0001, "RES SMD 4.7K OHM 1% 1/16W 0402", Manufacturer=YAGEO, Package Size=0402, Power Rating=1/16W, Resistance="4.7kOhm +/-1%", Assembled?=no, Manufacturer Part Number=RC0402FR-074K7P
U1: library part IC-STM32G431CBT6, "IC MCU 32BIT 128KB FLASH 48LQFP", Package=48LQFP, ComponentLink1Description=Datasheet, ComponentLink1URL=https://www.st.com/resource/en/datasheet/stm32g431cb.pdf
U2: library part IC-CAN-0001, "IC TRANSCEIVER 1/1 8SOIC", ComponentLink1Description=Datasheet, ComponentLink1URL=https://www.ti.com/lit/ds/symlink/tcan1044-q1.pdf?HQS=dis-dk-null-digikeymode-dsf-pf-null-wwe&ts=1728758303289&ref_url=https%253A%252F%252Fwww.ti.com%252Fgeneral%252Fdocs%252Fsuppproductinfo.tsp%253FdistId%253D10%2526gotoUrl%253Dhttps%253A%252F%252Fwww.ti.com%252Flit%252Fgpn%252Ftcan1044-q1
U3: library part IC-BUCK_0011, "6V to 42V Synchronous Step-Down Controller with Adjustable Output Voltage 14-HTSSOP -40 to 125", Manufacturer_Name="Texas Instruments", Copyright="Copyright (C) 2025 Ultra Librarian. All rights reserved.", Datasheet=https://www.ti.com/lit/gpn/lm3150, Manufacturer_Part_Number=LM3150MHE/NOPB, RefDes=RefDes, Type=Type
U5: library part SENS-CO2, "SENSOR CARBON DIOXIDE I2C OUTPUT", Package=Package, Check_prices=https://www.snapeda.com/parts/STC31-C-R3/Sensirion/view-part/?ref=eda, ComponentLink1Description=Datasheet, ComponentLink1URL=https://sensirion.com/media/documents/D9F76A0F/686E30AC/TC_DS_STC31-C_D1.pdf, MF=Sensirion, MP=STC31-C-R3, SnapEDA_Link=https://www.snapeda.com/parts/STC31-C-R3/Sensirion/view-part/?ref=snap
U6: library part SENS-Temp-Press-Humid, "DIGITAL HUMIDITY, PRESSURE AND TEMPERATURE SENSOR<br>* Digital interface IÂ²C (up to 3.4 MHz) and SPI (3 and 4 wire, up to 10 MHz)* Supply voltage VDD main supply voltage range: 1.71 V to 3.6 V*VDDIO interface voltage range: 1.2 V to 3.6 V<br> Operating range -40â€", Package=None, Availability=Unavailable, ComponentLink1Description=Datasheet, ComponentLink1URL=https://www.bosch-sensortec.com/media/boschsensortec/downloads/datasheets/bst-bme280-ds002.pdf, MP=BME280, Price=None
X1 X2 X5: library part "Micro-Fit Molex 3 Pin Right Angle", Package=43650-0300, DeviceName=43650-0300, DeviceSetName=HEADER_POS3_?, GateName_1=G$1, LibraryName=con-molex-micro-fit-3_0_2, SymbolName_1=HEADER_POS3
X3: library part HEADER_POS2_?43045-0200, Package=43045-0200, DeviceName=43045-0200, DeviceSetName=HEADER_POS2_?, GateName_1=G$1, LibraryName=con-molex-micro-fit-3_0_2, SymbolName_1=HEADER_POS2

## Free pads (board coordinates)
  round 6.35 hole 3.35: ""(35.179,32.385) ""(35.179,103.759) ""(100.965,31.75) ""(100.965,118.872)

## Via types
v1: diameter 0.46, hole 0.306, Top Layer to Bottom Layer, tented both sides, 177 vias
v2: diameter 0.46, hole 0.306, Top Layer to Bottom Layer, 97 vias

## Nets (pads, with @x,y where several pads share a name; then routed paths per layer and width w, separated by ;. In a path a pad name is that pad's centre, name@x,y a point inside that pad or via, vN(x,y) a via of type N, cw(c..) or ccw(c..) an arc to the next point about the centre after c; other vN are vias at no path point)
3V3: 3V3.1 C1.2 C2.2 C3.2 C4.2 C5.2 C6.2 C7.2 C8.2 C21.2 C22.1 C23.1 C24.1 C26.1 I2.2 I2.4 J1.03 J4.1 J4.4 R1.1 R2.1 R9.2 R10.2 R16.2 R17.2 R18.2 R22.1 U1.1 U1.20 U1.21 U1.24 U1.36 U1.48 U2.5 U5.6 U6.2 U6.6 U6.8 X5.P$3 | length 19.1
  Top Layer w0.508: R18.2@63.754,78.478 v2(63.754,79.248) ; R17.2@69.088,78.478 v2(69.088,79.248) ; R16.2@74.549,78.605 v2(74.549,79.375) ; C21.2@84.096,98.044 84.096,99.508 ; R22.1@85.217,106.299 85.217,106.249 84.096,105.128 84.096,99.508 ; 3V3.1@88.392,101.427 86.015,101.427 84.096,99.508 ; U5.6@88.767,72.936 88.767,73.019 89.227,73.479 89.87,73.479 v2(89.916,73.525) ; R9.2@97.909,43.307 v2(98.679,43.307) ; R10.2@102.608,43.307 v2(103.378,43.307)
  other v2: 89.535,56.134 90.17,56.134 89.535,56.769 90.17,56.769 76.073,57.785 76.708,57.785 76.073,58.42 76.708,58.42 64.262,62.992 64.897,62.992 64.262,63.627 64.897,63.627 89.065,67.564 78.232,69.85 78.867,69.85 78.232,70.485 78.867,70.485 104.521,77.597 105.156,77.597 84.582,78.867 85.344,78.867 94.234,79.375 84.582,79.629 85.344,79.629 83.566,87.376 84.201,87.376 84.836,87.376 83.566,88.011 84.201,88.011 84.836,88.011